# Altium PCB VT 12S LHS V0.1.PcbDoc
Units mm, origin at the board's own origin, x right, y up, seen from the top; angles counter-clockwise.
Board outline 183.38 x 164.65 mm, 2 copper layers (Top Layer, Bottom Layer), stack 0.049 mm thick; 8 components, 7 nets, 21 pads, 42 vias.
Unrouted connection lines stored in the file: 21.
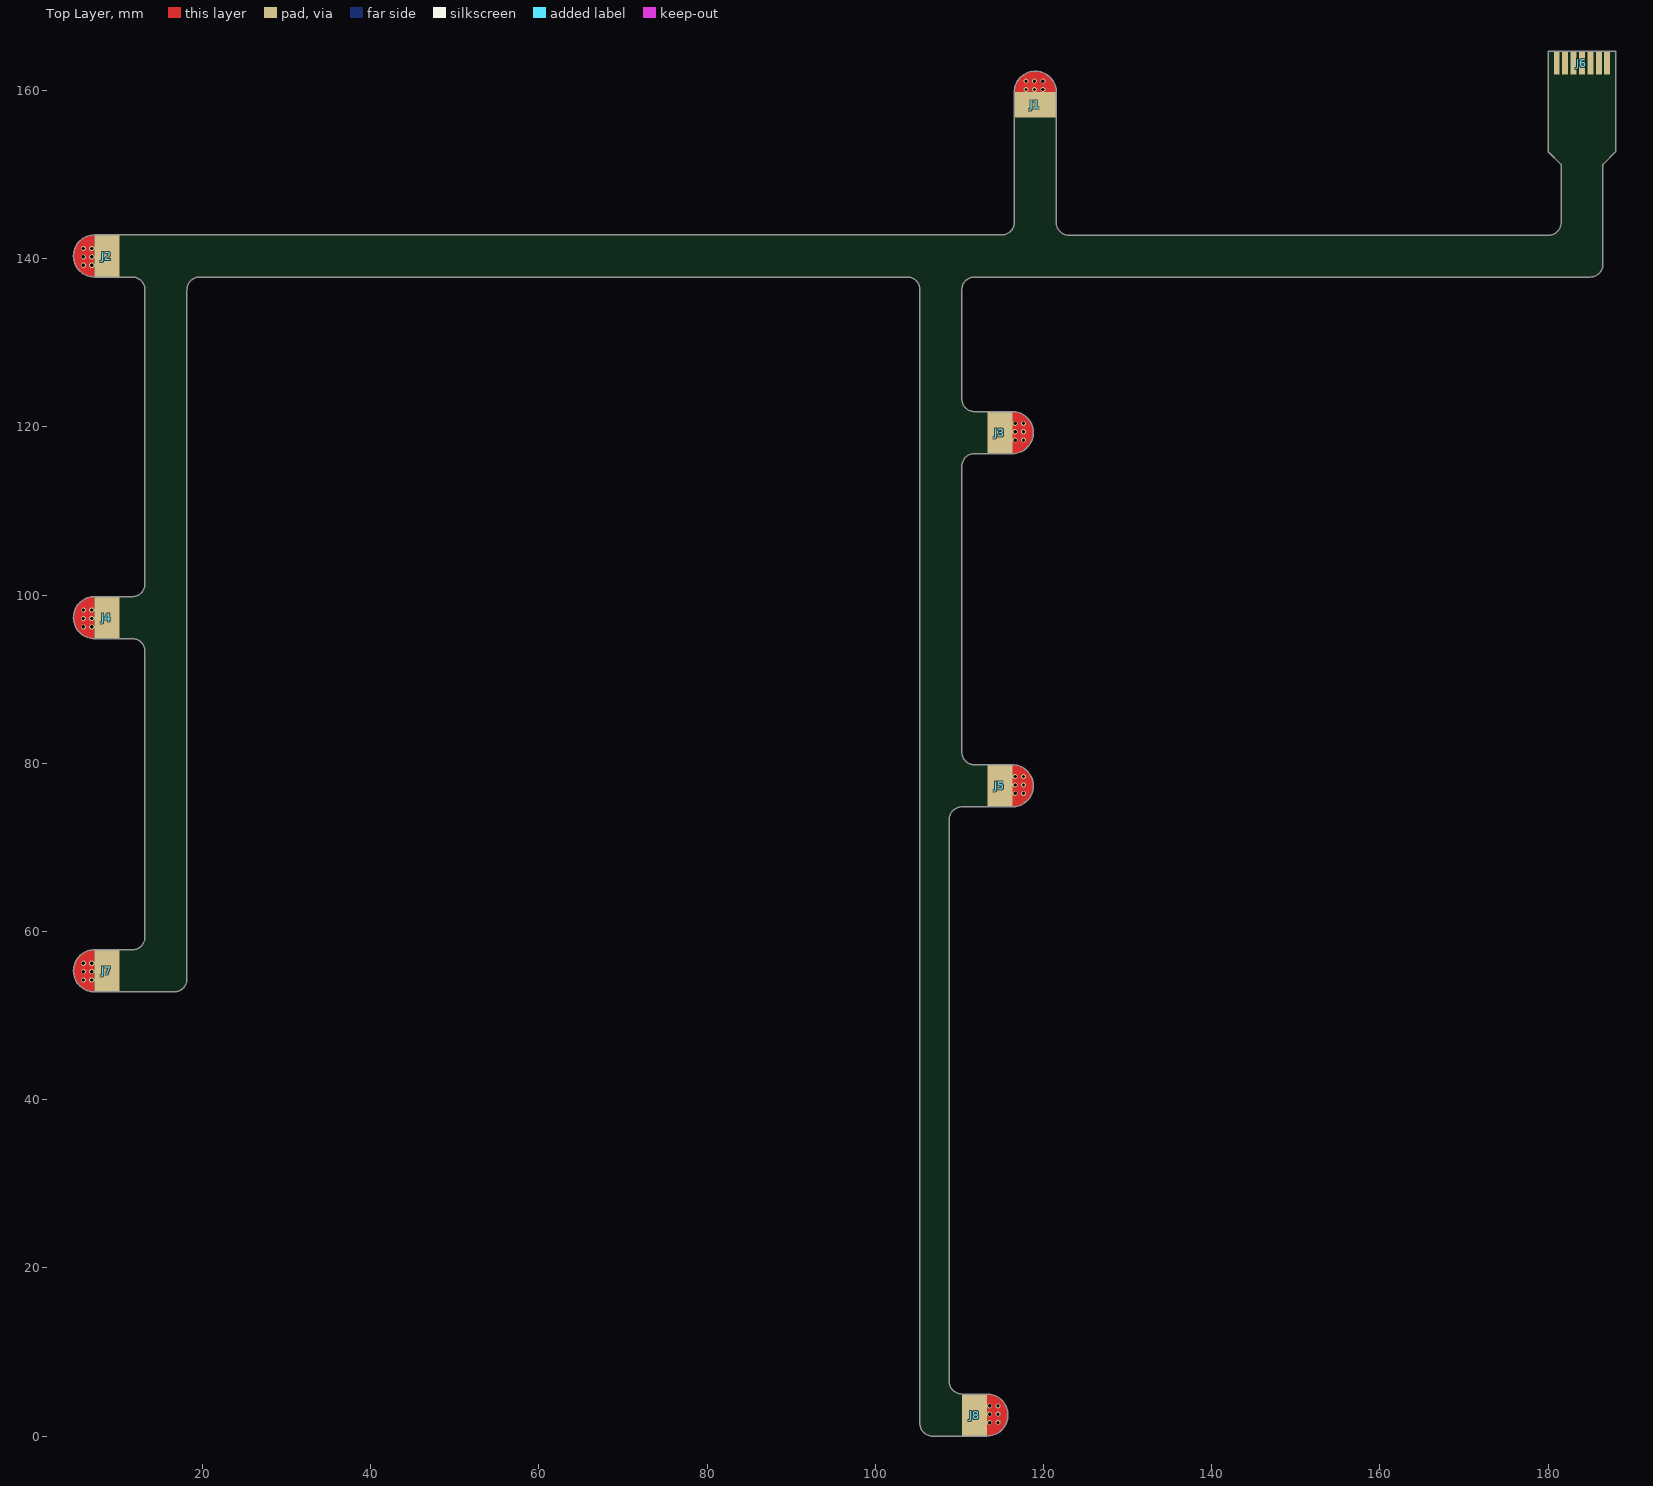
[diagram p0: Top Layer view]
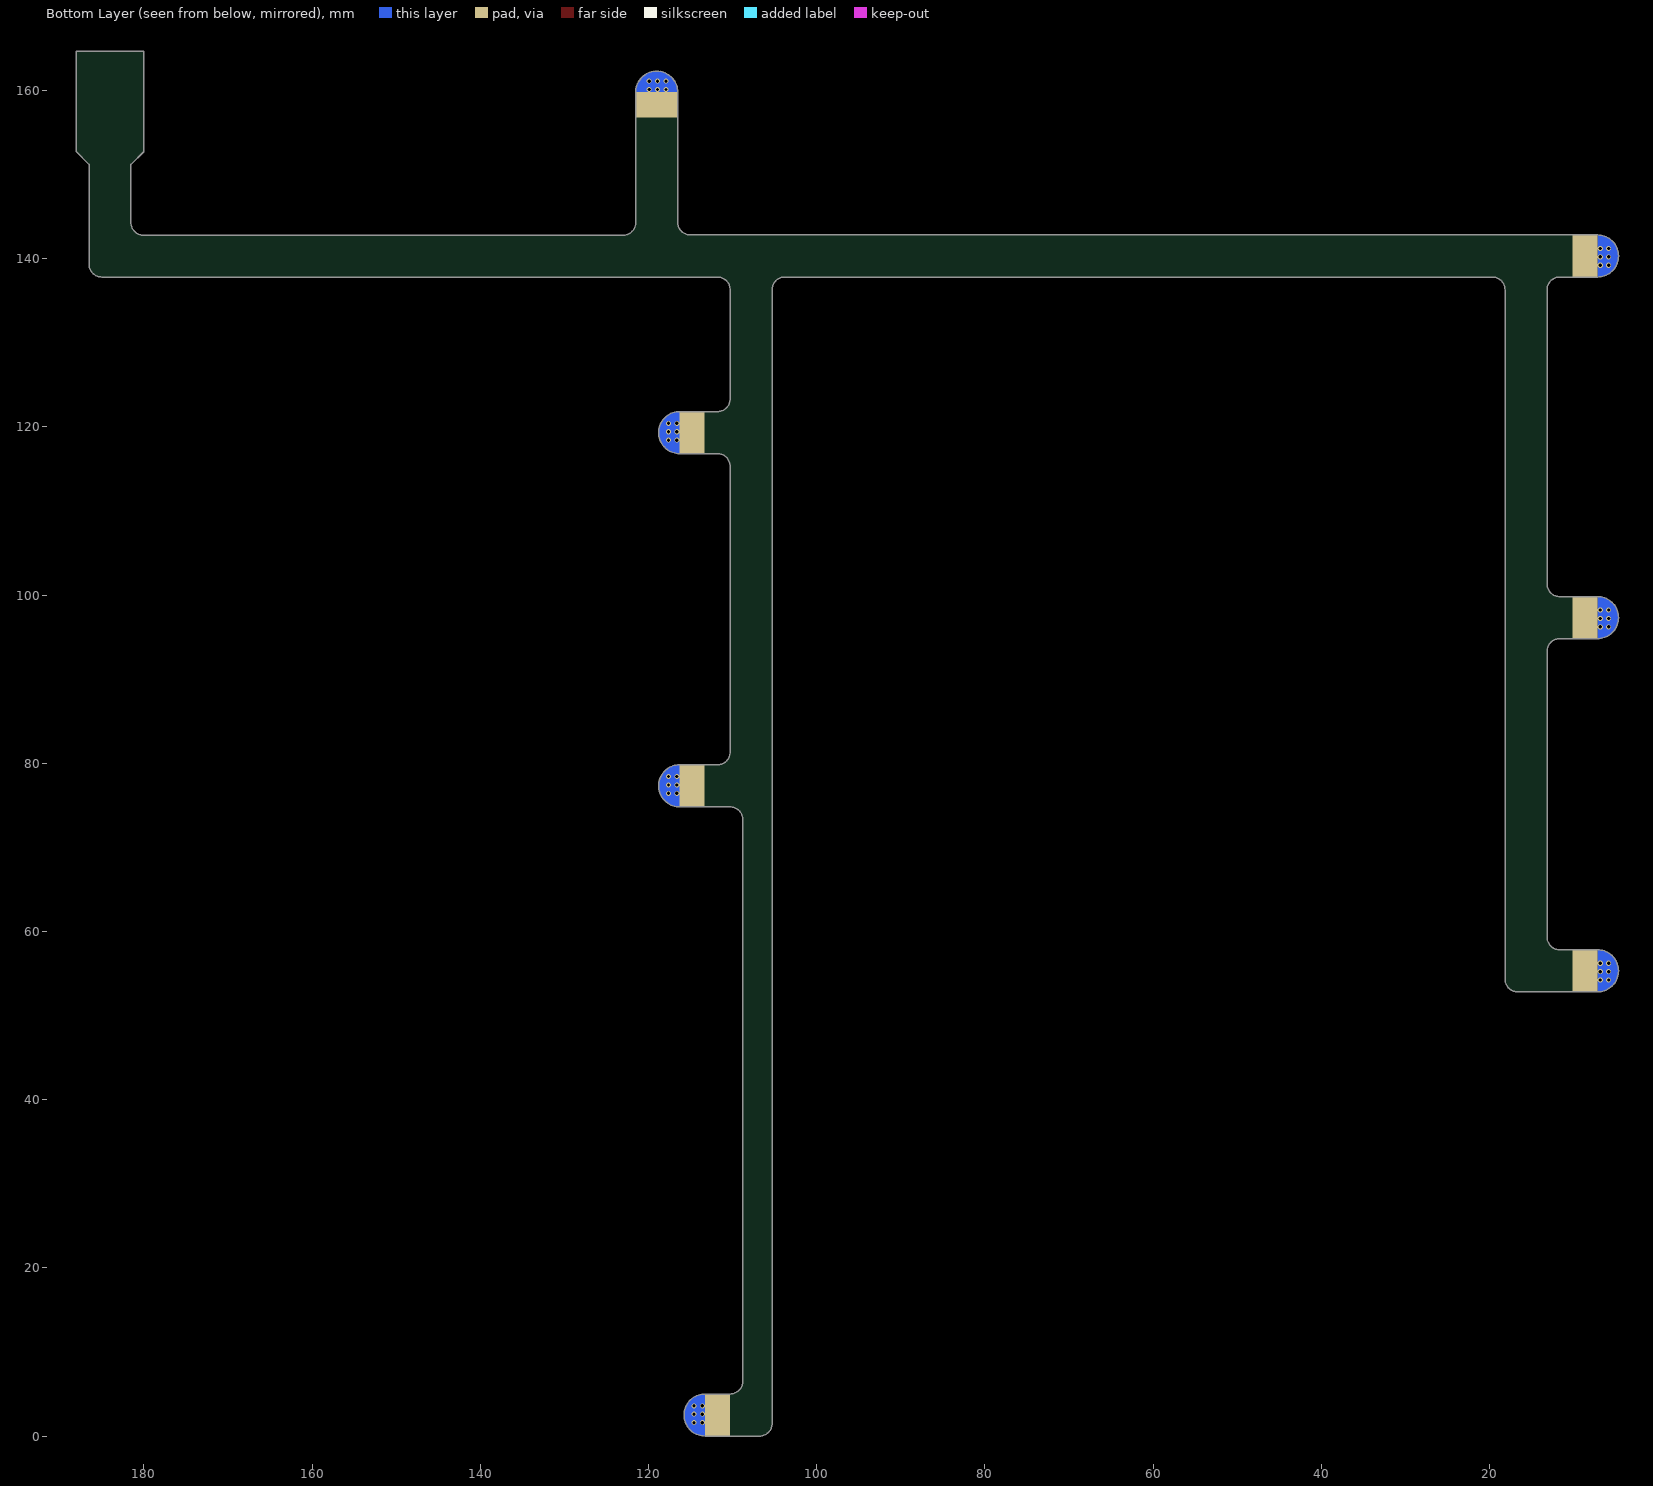
[diagram p1: Bottom Layer view, seen from below]

## Layer stack, top to bottom
Top Solder: solder mask 0.0275, Polyimide, Dk 3.5
Top Layer: signal copper 0.012
Dielectric 1: dielectric 0.025, Polyimide, Dk 3.3
Bottom Layer: signal copper 0.012
Bottom Solder: solder mask 0.0275, Polyimide, Dk 3.5

## Board outline
7.15,52.825 cw(c7.15,55.325) 4.65,55.325 cw(c7.15,55.325) 7.15,57.825 11.65,57.825 ccw(c11.65,59.325) 13.15,59.325 13.15,93.325 ccw(c11.65,93.325) 11.65,94.825 7.15,94.825 cw(c7.15,97.325) 4.65,97.325 cw(c7.15,97.325) 7.15,99.825 11.65,99.825 ccw(c11.65,101.325) 13.15,101.325 13.15,136.325 ccw(c11.65,136.325) 11.65,137.825 7.15,137.825 cw(c7.15,140.325) 4.65,140.325 cw(c7.15,140.325) 7.15,142.825 115.025,142.825 ccw(c115.025,144.325) 116.525,144.325 116.525,159.8 cw(c119.025,159.8) 119.025,162.3 cw(c119.025,159.8) 121.525,159.8 121.525,156.825 121.525,144.3 ccw(c123.025,144.3) 123.025,142.8 180.05,142.8 ccw(c180.05,144.3) 181.55,144.3 181.55,151.21 180.035,152.725 180.035,164.65 188.035,164.65 188.035,152.725 186.525,151.215 186.525,139.325 cw(c185.025,139.325) 185.025,137.825 111.8,137.825 ccw(c111.8,136.325) 110.3,136.325 110.3,123.325 ccw(c111.8,123.325) 111.8,121.825 113.325,121.825 116.3,121.825 cw(c116.3,119.325) 118.8,119.325 cw(c116.3,119.325) 116.3,116.825 111.8,116.825 ccw(c111.8,115.325) 110.3,115.325 110.3,81.325 ccw(c111.8,81.325) 111.8,79.825 116.3,79.825 cw(c116.3,77.325) 118.8,77.325 cw(c116.3,77.325) 116.3,74.825 113.325,74.825 110.3,74.825 ccw(c110.3,73.325) 108.8,73.325 108.8,6.5 ccw(c110.3,6.5) 110.3,5 113.275,5 cw(c113.275,2.5) 115.775,2.5 cw(c113.275,2.5) 113.275,0 110.3,0 106.8,0 cw(c106.8,1.5) 105.3,1.5 105.3,136.325 ccw(c103.8,136.325) 103.8,137.825 19.65,137.82 19.65,137.825 ccw(c19.65,136.325) 18.15,136.325 18.15,54.325 cw(c16.65,54.325) 16.65,52.825 10.125,52.825
board region Flex: 128.775,137.825 111.8,137.825 111.653,137.818 111.365,137.76 111.093,137.648 110.848,137.484 110.64,137.277 110.477,137.032 110.365,136.76 110.307,136.472 110.3,136.325 110.3,123.325 110.307,123.178 110.365,122.89 110.477,122.618 110.64,122.373 110.848,122.165 111.093,122.002 111.365,121.89 111.653,121.832 111.8,121.825 113.325,121.825 116.3,121.825 116.546,121.825 117.029,121.729 117.484,121.54 117.894,121.267 118.242,120.919 118.515,120.509 118.704,120.054 118.8,119.571 118.8,119.325 118.8,119.079 118.704,118.596 118.515,118.141 118.242,117.731 117.894,117.383 117.484,117.11 117.029,116.921 116.546,116.825 116.3,116.825 111.8,116.825 111.653,116.818 111.365,116.76 111.093,116.648 110.848,116.484 110.64,116.277 110.477,116.032 110.365,115.76 110.307,115.472 110.3,115.325 110.3,81.325 110.307,81.178 110.365,80.89 110.477,80.618 110.64,80.373 110.848,80.165 111.093,80.002 111.365,79.89 111.653,79.832 111.8,79.825 116.3,79.825 116.546,79.825 117.029,79.729 117.484,79.54 117.894,79.267 118.242,78.919 118.515,78.509 118.704,78.054 118.8,77.571 118.8,77.325 118.8,77.079 118.704,76.596 118.515,76.141 118.242,75.731 117.894,75.383 117.484,75.11 117.029,74.921 116.546,74.825 116.3,74.825 113.325,74.825 110.3,74.825 110.153,74.818 109.865,74.76 109.593,74.648 109.348,74.485 109.14,74.277 108.977,74.032 108.865,73.76 108.807,73.472 108.8,73.325 108.8,6.5 108.807,6.353 108.865,6.065 108.977,5.793 109.14,5.548 109.348,5.34 109.593,5.177 109.865,5.065 110.153,5.007 110.3,5 113.275,5 113.521,5 114.004,4.904 114.459,4.715 114.869,4.442 115.217,4.094 115.49,3.684 115.679,3.229 115.775,2.746 115.775,2.5 115.775,2.254 115.679,1.771 115.49,1.316 115.217,0.906 114.869,0.558 114.459,0.285 114.004,0.096 113.521,0 113.275,0 110.3,0 106.8,0 106.652,0 106.362,0.058 106.089,0.171 105.844,0.335 105.635,0.544 105.471,0.789 105.358,1.062 105.3,1.352 105.3,1.5 105.3,136.325 105.293,136.472 105.235,136.76 105.123,137.032 104.959,137.277 104.752,137.485 104.507,137.648 104.235,137.76 103.947,137.818 103.8,137.825 19.65,137.825 19.503,137.818 19.215,137.76 18.943,137.648 18.698,137.485 18.49,137.277 18.327,137.032 18.215,136.76 18.157,136.472 18.15,136.325 18.15,54.325 18.15,54.177 18.092,53.887 17.979,53.614 17.815,53.369 17.606,53.16 17.361,52.996 17.088,52.883 16.798,52.825 16.65,52.825 10.125,52.825 7.15,52.825 6.904,52.825 6.421,52.921 5.966,53.11 5.556,53.383 5.208,53.731 4.935,54.141 4.746,54.596 4.65,55.079 4.65,55.325 4.65,55.571 4.746,56.054 4.935,56.509 5.208,56.919 5.556,57.267 5.966,57.54 6.421,57.729 6.904,57.825 7.15,57.825 11.65,57.825 11.797,57.832 12.085,57.89 12.357,58.002 12.602,58.165 12.809,58.373 12.973,58.618 13.085,58.89 13.143,59.178 13.15,59.325 13.15,93.325 13.143,93.472 13.085,93.76 12.973,94.032 12.809,94.277 12.602,94.485 12.357,94.648 12.085,94.76 11.797,94.818 11.65,94.825 7.15,94.825 6.904,94.825 6.421,94.921 5.966,95.11 5.556,95.383 5.208,95.731 4.935,96.141 4.746,96.596 4.65,97.079 4.65,97.325 4.65,97.571 4.746,98.054 4.935,98.509 5.208,98.919 5.556,99.267 5.966,99.54 6.421,99.729 6.904,99.825 7.15,99.825 11.65,99.825 11.797,99.832 12.085,99.89 12.357,100.002 12.602,100.165 12.81,100.373 12.973,100.618 13.085,100.89 13.143,101.178 13.15,101.325 13.15,136.325 13.143,136.472 13.085,136.76 12.973,137.032 12.81,137.277 12.602,137.485 12.357,137.648 12.085,137.76 11.797,137.818 11.65,137.825 7.15,137.825 6.904,137.825 6.421,137.921 5.966,138.11 5.556,138.383 5.208,138.731 4.935,139.141 4.746,139.596 4.65,140.079 4.65,140.325 4.65,140.571 4.746,141.054 4.935,141.509 5.208,141.919 5.556,142.267 5.966,142.54 6.421,142.729 6.904,142.825 7.15,142.825 115.025,142.825 115.172,142.832 115.46,142.89 115.732,143.002 115.977,143.165 116.184,143.373 116.348,143.618 116.46,143.89 116.518,144.178 116.525,144.325 116.525,159.8 116.525,160.046 116.621,160.529 116.81,160.984 117.083,161.394 117.431,161.742 117.841,162.015 118.296,162.204 118.779,162.3 119.025,162.3 119.271,162.3 119.754,162.204 120.209,162.015 120.619,161.742 120.967,161.394 121.24,160.984 121.429,160.529 121.525,160.046 121.525,159.8 121.525,156.825 121.525,144.3 121.532,144.153 121.59,143.865 121.702,143.593 121.865,143.348 122.073,143.14 122.318,142.977 122.59,142.865 122.878,142.807 123.025,142.8 128.775,142.8
board region Anchor: 128.775,142.8 180.05,142.8 180.197,142.807 180.485,142.865 180.757,142.977 181.002,143.14 181.21,143.348 181.373,143.593 181.485,143.865 181.543,144.153 181.55,144.3 181.55,151.21 180.035,152.725 180.035,164.65 188.035,164.65 188.035,152.725 186.525,151.215 186.525,139.325 186.525,139.177 186.467,138.887 186.354,138.614 186.19,138.369 185.981,138.16 185.736,137.996 185.463,137.883 185.173,137.825 185.025,137.825 128.775,137.825

## Design rules (kind name [scope] priority, off if disabled: settings)
Clearance [All] p1: gap=0.152 ignorepadtopadclearanceinfootprint=FALSE
DiffPairsRouting [All] p1: maxlimit=0.254 minlimit=0.254 mostfreqgap=0.254 toplayer_minwidth=0.381 toplayer_maxwidth=0.381 toplayer_prefwidth=0.381 bottomlayer_minwidth=0.381 bottomlayer_maxwidth=0.381 bottomlayer_prefwidth=0.381 substack1={34D787CE-2DC0-4B00-A6B0-2647A249037B} toplayer_{34d787ce-2dc0-4b00-a6b0-2647a249037b}_minwidth=0.381 toplayer_{34d787ce-2dc0-4b00-a6b0-2647a249037b}_maxwidth=0.381 toplayer_{34d787ce-2dc0-4b00-a6b0-2647a249037b}_prefwidth=0.381 bottomlayer_{34d787ce-2dc0-4b00-a6b0-2647a249037b}_minwidth=0.381 bottomlayer_{34d787ce-2dc0-4b00-a6b0-2647a249037b}_maxwidth=0.381 bottomlayer_{34d787ce-2dc0-4b00-a6b0-2647a249037b}_prefwidth=0.381 maxuncoupledlength=12.7
HoleToHoleClearance [All] p1: gap=0.254 allowstackedmicrovias=FALSE
PolygonConnect [All] p1: connectstyle=Direct reliefconductorwidth=0.254 reliefentries=4 polygonreliefangle="90 Angle" airgapwidth=0.254
RoutingVias [All] p1: holewidth=0.4 width=0.7 viastyle="Through Hole" minholewidth=0.2 minwidth=0.4 maxholewidth=1 maxwidth=1.2
SolderMaskExpansion SolderMaskExpansion_Via [IsVia] p1: expansion=0.102 istentingtop=TRUE
SolderMaskExpansion [All] p2: expansion=0.051 istentingtop=FALSE
Width [All] p1: maxlimit=2.54 minlimit=0.152 preferedwidth=0.254 substack1={34D787CE-2DC0-4B00-A6B0-2647A249037B}
28 further rules are at their usual default settings.

## Components (designator, comment, footprint, x,y, rotation, side; value= is the part's Value field where it differs from the comment)
J1 "Voltage Tap" "Voltage Tap" 119.025,158.325 r270 top
J2 "Voltage Tap" "Voltage Tap" 8.625,140.325 r0 top
J3 "Voltage Tap" "Voltage Tap" 114.825,119.325 r180 top
J4 "Voltage Tap" "Voltage Tap" 8.625,97.325 r0 top
J5 "Voltage Tap" "Voltage Tap" 114.825,77.325 r180 top
J6 "84953-7-FPC" "84953-7 - FPC" 184.035,163.275 r0 top
J7 "Voltage Tap" "Voltage Tap" 8.625,55.325 r0 top
J8 "Voltage Tap" "Voltage Tap" 111.8,2.5 r180 top

## Footprints (in the part's own frame and the unit in brackets; to place one, negate y for a bottom-side part, rotate by r counter-clockwise, add the part's x,y. Pads: shape width x height; smd on the part's side, far side on the other; paste and mask are expansions set on the pad)
"84953-7 - FPC" [mm] "FPC Connectors, Flex-to-Board, 7 Position, .039 in [1 mm] Centerline, FPC Connector, Top Contact"
  rect 0.71x2.7 smd: 1(-3,0) 2(-2,0) 3(-1,0) 4(0,0) 5(1,0) 6(2,0) 7(3,0)
"Voltage Tap" [mm] "Voltage Tap"
  rect 3x5 smd mask+0: 1(0,0)
  rect 3x5 smd far side mask+0: 1(0,0)
  Top Layer region: -1.475,2.5 -1.475,-2.5 -2.56,-2.252 -3.43,-1.559 -3.912,-0.556 -3.912,0.556 -3.43,1.559 -2.56,2.252 -1.475,2.5
  Bottom Layer region: -1.475,2.5 -1.475,-2.5 -2.56,-2.252 -3.43,-1.559 -3.912,-0.556 -3.912,0.556 -3.43,1.559 -2.56,2.252 -1.475,2.5
  Bottom Layer region: -1.475,2.5 -1.475,-2.5 -2.56,-2.252 -3.43,-1.559 -3.912,-0.556 -3.912,0.556 -3.43,1.559 -2.56,2.252 -1.475,2.5

## Part data
J6: "FPC Connectors, Flex-to-Board, 7 Position, .039 in [1 mm] Centerline, FPC Side Connector"

## Via types
v1: diameter 0.6, hole 0.4, Top Layer to Bottom Layer, tented both sides, 42 vias

## Nets (pads, with @x,y where several pads share a name; then routed paths per layer and width w, separated by ;. In a path a pad name is that pad's centre, name@x,y a point inside that pad or via, vN(x,y) a via of type N, cw(c..) or ccw(c..) an arc to the next point about the centre after c; other vN are vias at no path point)
NetJ1_1: J1.1 J6.1
  other v1: 117.925,160.125 118.925,160.125 119.925,160.125 117.925,161.125 118.925,161.125 119.925,161.125
NetJ2_1: J2.1 J6.2
  other v1: 5.825,139.225 6.825,139.225 5.825,140.225 6.825,140.225 5.825,141.225 6.825,141.225
NetJ3_1: J3.1 J6.3
  other v1: 116.625,118.425 117.625,118.425 116.625,119.425 117.625,119.425 116.625,120.425 117.625,120.425
NetJ4_1: J4.1 J6.4
  other v1: 5.825,96.225 6.825,96.225 5.825,97.225 6.825,97.225 5.825,98.225 6.825,98.225
NetJ5_1: J5.1 J6.5
  other v1: 116.625,76.425 117.625,76.425 116.625,77.425 117.625,77.425 116.625,78.425 117.625,78.425
NetJ6_6: J6.6 J7.1
  other v1: 5.825,54.225 6.825,54.225 5.825,55.225 6.825,55.225 5.825,56.225 6.825,56.225
NetJ6_7: J6.7 J8.1
  other v1: 113.6,1.6 114.6,1.6 113.6,2.6 114.6,2.6 113.6,3.6 114.6,3.6

## Silkscreen, mask and mechanical layers (free items; w line width, h text height)
Board Shape:
  lines w0.05: 10.125,52.825 16.65,52.825 ccw(c16.65,54.325) 18.15,54.325 18.15,136.325 cw(c19.65,136.325) 19.65,137.825 ; 10.125,57.825 11.65,57.825 ccw(c11.65,59.325) 13.15,59.325 13.15,93.325 ccw(c11.65,93.325) 11.65,94.825 10.125,94.825 ; 10.125,99.825 11.65,99.825 ccw(c11.65,101.325) 13.15,101.325 13.15,134.45 13.15,136.325 ccw(c11.65,136.325) 11.65,137.825 10.125,137.825 ; 10.125,142.825 115.025,142.825 ccw(c115.025,144.325) 116.525,144.325 116.525,156.825 ; 19.65,137.82 103.8,137.825 cw(c103.8,136.325) 105.3,136.325 105.3,1.5 ccw(c106.8,1.5) 106.8,0 110.3,0 ; 110.3,5 cw(c110.3,6.5) 108.8,6.5 108.8,73.325 cw(c110.3,73.325) 110.3,74.825 113.325,74.825 ; 113.325,79.825 111.8,79.825 cw(c111.8,81.325) 110.3,81.325 110.3,115.325 cw(c111.8,115.325) 111.8,116.825 113.325,116.825 ; 113.325,121.825 111.8,121.825 cw(c111.8,123.325) 110.3,123.325 110.3,136.325 cw(c111.8,136.325) 111.8,137.825 185.025,137.825 ccw(c185.025,139.325) 186.525,139.325 186.525,151.215 188.035,152.725 188.035,164.65 180.035,164.65 180.035,152.725 181.55,151.21 181.55,150.9 181.55,144.3 cw(c180.05,144.3) 180.05,142.8 123.025,142.8 cw(c123.025,144.3) 121.525,144.3 121.525,156.825
Mechanical Colab:
  lines w0.013: 20.66,137.82 20.66,142.82 ; 23.88,137.82 23.88,142.82 ; 94.58,137.82 94.58,142.82 ; 97.8,137.82 97.8,142.82 ; 105.3,32.1 110.3,32.1 ; 105.3,35.32 110.3,35.32 ; 4.66,52.82 4.66,57.82 13.16,57.82 13.16,94.82 4.66,94.82 4.66,99.82 13.16,99.82 13.16,137.82 4.66,137.82 4.66,142.82 116.535,142.82 116.535,162.32 121.535,162.32 121.535,142.82 181.535,142.82 181.535,162.32 186.535,162.32 186.535,137.82 110.3,137.82 110.3,121.82 118.8,121.82 118.8,116.82 110.3,116.82 110.3,79.82 118.8,79.82 118.8,74.82 110.3,74.82 110.3,5 113.8,5 113.8,0 105.3,0 105.3,137.82 18.16,137.82 18.16,52.82 4.66,52.82

## Text inside footprints (layer, text, board x,y; h text height)
J6: Stiffener Backing "Total FPC width on stiffener / 0.3mm +- 0.05mm" at 179.06,165.075 h1